# EAGLE board Display50_Cape (EAGLE 7.7.0)
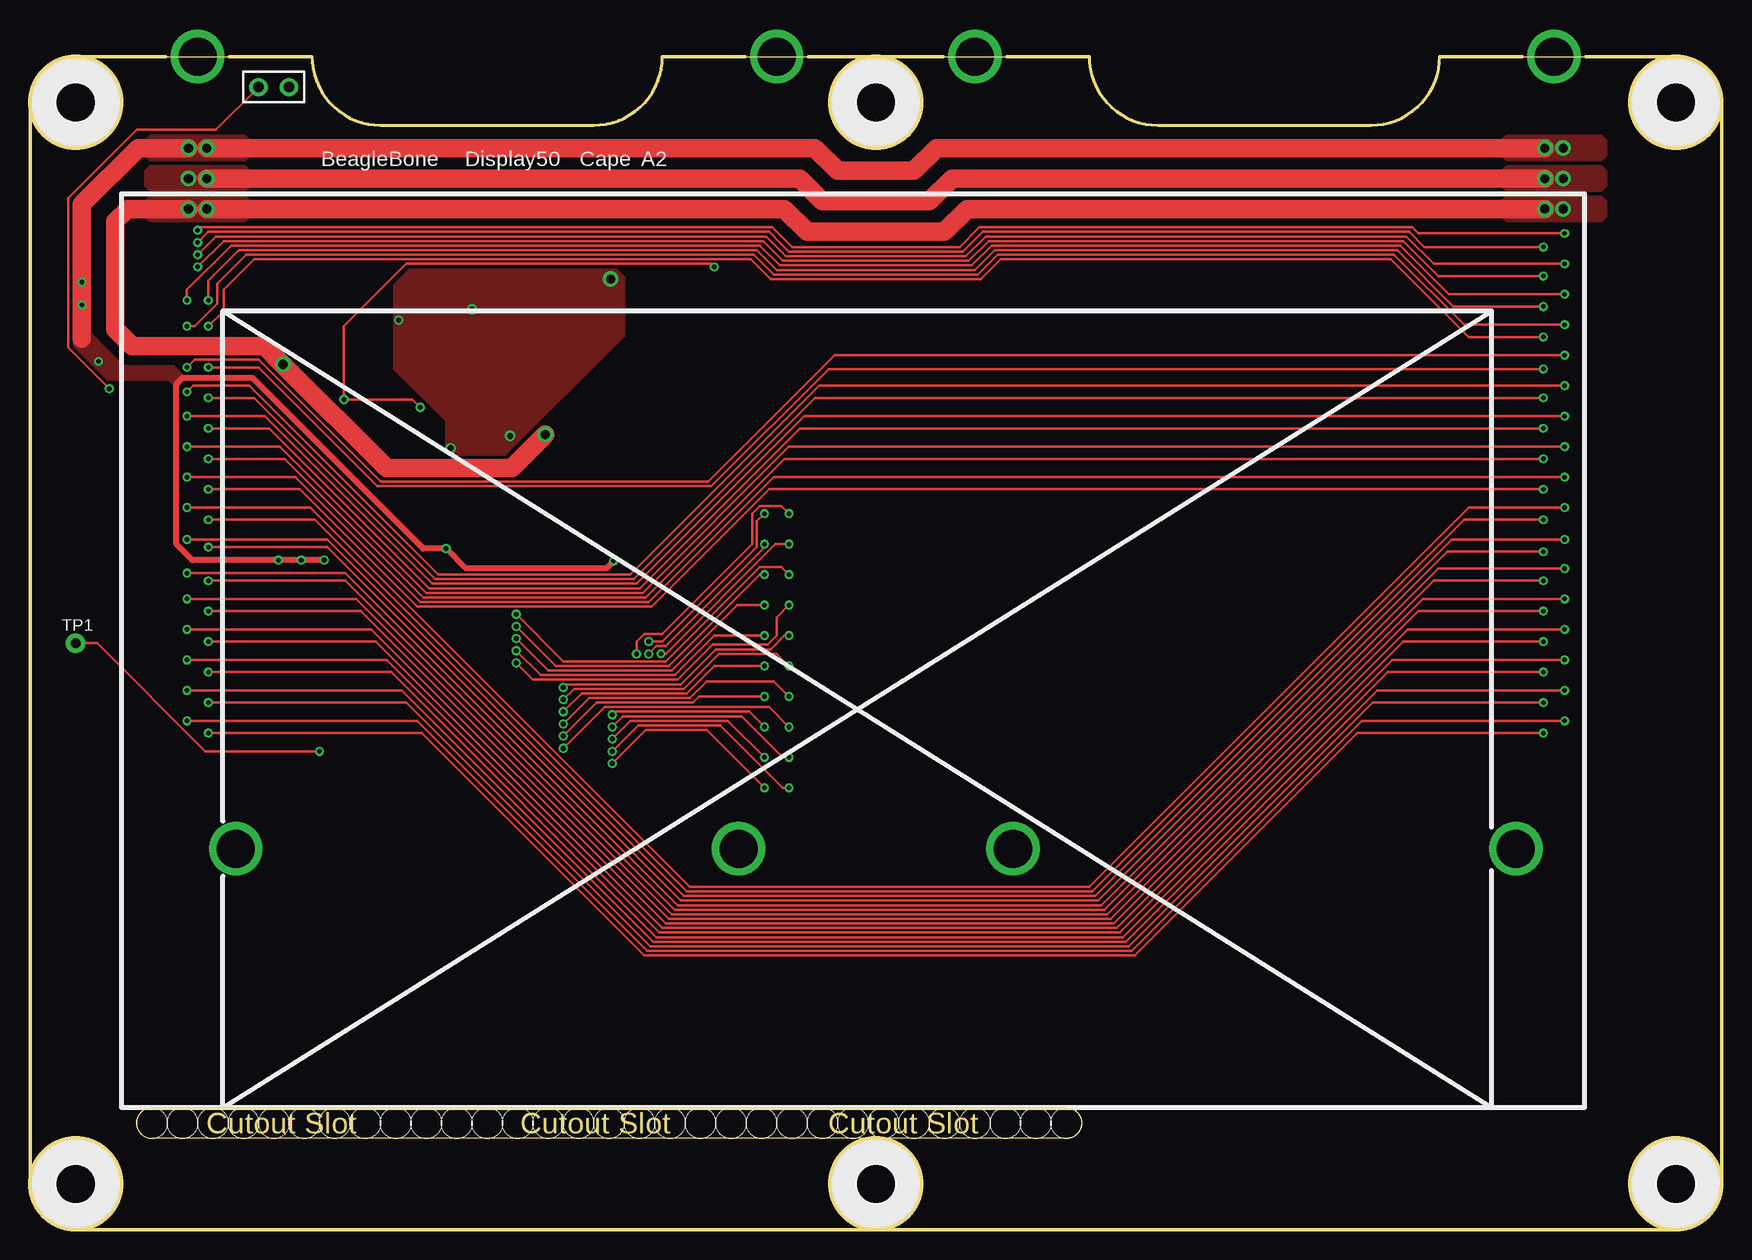
[diagram p0: board, top side]
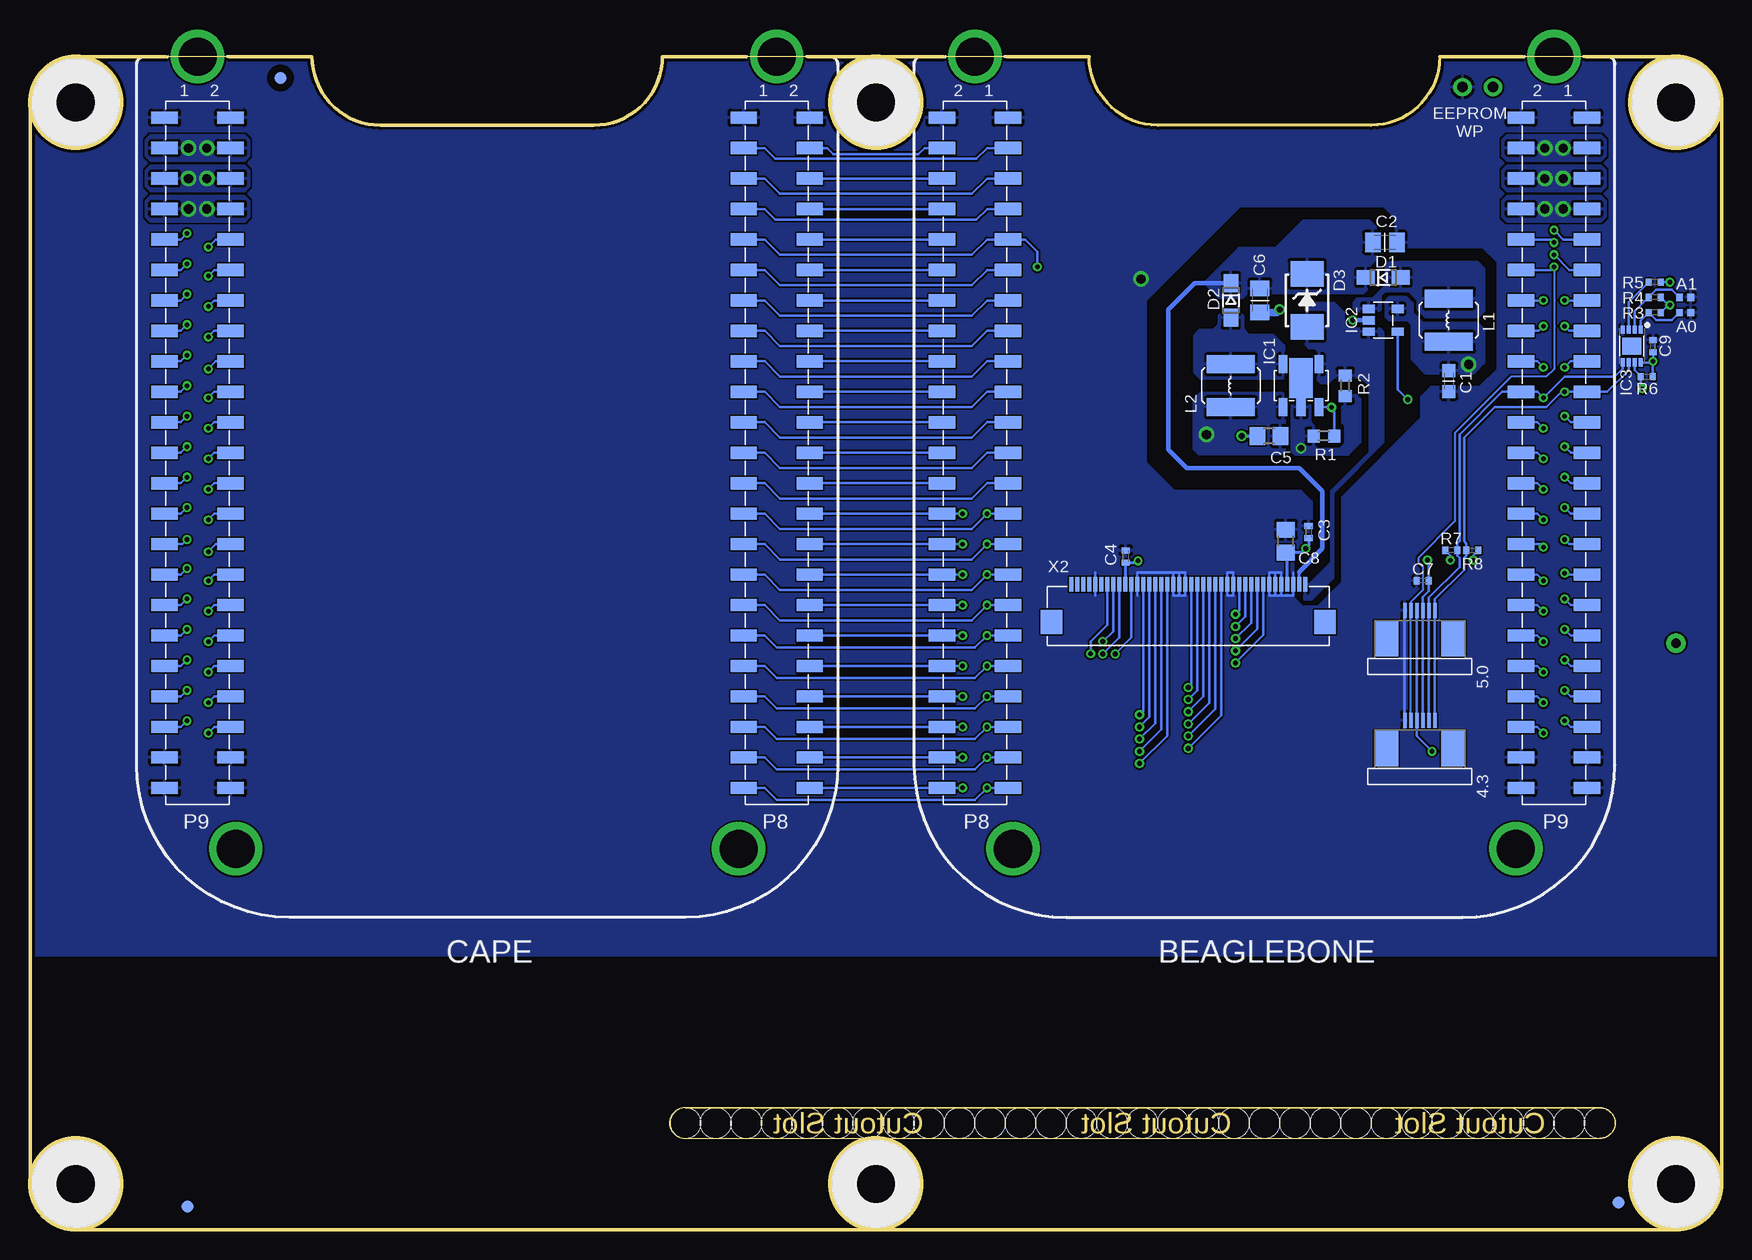
[diagram p1: board, bottom side, seen from below]

Size 140.97 x 97.79 mm. Coordinates in mm from the lower left corner, seen from the top.
Outline: 11.33,97.79 3.81,97.79 arc90 0,93.98 0,3.81 arc90 3.81,0 137.16,0 arc90 140.97,3.81 140.97,93.98 arc90 137.16,97.79 129.64,97.79
Outline: 16.61,97.79 23.5,97.79 arc90 29.21,92.08 46.99,92.08 arc90 52.7,97.79 59.59,97.79
Outline: 64.87,97.79 76.1,97.79
Outline: 81.38,97.79 88.27,97.79 arc90 93.98,92.08 111.76,92.08 arc90 117.47,97.79 124.36,97.79
Outline: 86.36,7.62 10.16,7.62 arc-180 10.16,10.16 86.36,10.16 arc-180 86.36,7.62
Outline: circle at 137.16,3.81 radius 3.81
Outline: circle at 3.81,3.81 radius 3.81
Outline: circle at 3.81,93.98 radius 3.81
Outline: circle at 137.16,93.98 radius 3.81
Outline: circle at 70.48,93.98 radius 3.81
Outline: circle at 70.48,3.81 radius 3.81
Copper layers (1+16): Top 0.035mm / dielectric 1.5mm / Bottom 0.035mm
Design rules "default *": minimum track width 6mil, minimum drill 12mil, track to track 6mil, track to pad 6mil, pad to pad 6mil, via to via 6mil, smd to smd 6mil, copper to edge 10mil, drill to drill 8mil, minimum pad ring 10mil, minimum via ring 7mil, stop-mask expansion 4mil, vias tented up to drill 35mil, thermal gap 10mil
Holes 3.2 mm at 70.48,3.81 70.48,93.98 137.16,3.81 137.16,93.98 3.81,3.81 3.81,93.98
Holes 2.54 mm at 38.1,8.89 43.18,8.89 48.26,8.89 53.34,8.89 58.42,8.89 63.5,8.89 68.58,8.89 73.66,8.89 78.74,8.89 83.82,8.89 33.02,8.89 30.48,8.89 25.4,8.89 22.86,8.89 17.78,8.89 12.7,8.89 10.16,8.89 15.24,8.89 20.32,8.89 27.94,8.89 35.56,8.89 40.64,8.89 45.72,8.89 50.8,8.89 55.88,8.89 60.96,8.89 66.04,8.89 71.12,8.89 76.2,8.89 81.28,8.89 86.36,8.89
bRestrict: 5 lines
Milling: 20 lines

## Footprints (pad centres in the part's own frame; a part is rotated, then mirrored left to right if it is on the bottom)
6-PIN-(0.5MM-PITCH)-FPC-CONNECTOR = smd 0.3 x 1.25: 1 -1.25,-2.325; 2 -0.75,-2.325; 3 -0.25,-2.325; 4 0.25,-2.325; 5 0.75,-2.325; 6 1.25,-2.325 | smd 2 x 3: M1 -2.79,0; M2 2.79,0
BEAGLEBONE.CAPE.DISPLAY-X.BEAGLEBONE = smd 1.02 x 2.2 bottom: B8.1 5.08,21.38; B8.2 5.08,26.88; B8.3 7.62,21.38; B8.4 7.62,26.88; B8.5 10.16,21.38; B8.6 10.16,26.88; B8.7 12.7,21.38; B8.8 12.7,26.88; B8.9 15.24,21.38; B8.10 15.24,26.88; B8.11 17.78,21.38; B8.12 17.78,26.88; B8.13 20.32,21.38; B8.14 20.32,26.88; B8.15 22.86,21.38; B8.16 22.86,26.88; B8.17 25.4,21.38; B8.18 25.4,26.88; B8.19 27.94,21.38; B8.20 27.94,26.88; B8.21 30.48,21.38; B8.22 30.48,26.88; B8.23 33.02,21.38; B8.24 33.02,26.88; B8.25 35.56,21.38; B8.26 35.56,26.88; B8.27 38.1,21.38; B8.28 38.1,26.88; B8.29 40.64,21.38; B8.30 40.64,26.88; B8.31 43.18,21.38; B8.32 43.18,26.88; B8.33 45.72,21.38; B8.34 45.72,26.88; B8.35 48.26,21.38; B8.36 48.26,26.88; B8.37 50.8,21.38; B8.38 50.8,26.88; B8.39 53.34,21.38; B8.40 53.34,26.88; B8.41 55.88,21.38; B8.42 55.88,26.88; B8.43 58.42,21.38; B8.44 58.42,26.88; B8.45 60.96,21.38; B8.46 60.96,26.88; B9.1 5.08,-26.88; B9.2 5.08,-21.38; B9.3 7.62,-26.88; B9.4 7.62,-21.38; B9.5 10.16,-26.88; B9.6 10.16,-21.38; B9.7 12.7,-26.88; B9.8 12.7,-21.38; B9.9 15.24,-26.88; B9.10 15.24,-21.38; B9.11 17.78,-26.88; B9.12 17.78,-21.38; B9.13 20.32,-26.88; B9.14 20.32,-21.38; B9.15 22.86,-26.88; B9.16 22.86,-21.38; B9.17 25.4,-26.88; B9.18 25.4,-21.38; B9.19 27.94,-26.88; B9.20 27.94,-21.38; B9.21 30.48,-26.88; B9.22 30.48,-21.38; B9.23 33.02,-26.88; B9.24 33.02,-21.38; B9.25 35.56,-26.88; B9.26 35.56,-21.38; B9.27 38.1,-26.88; B9.28 38.1,-21.38; B9.29 40.64,-26.88; B9.30 40.64,-21.38; B9.31 43.18,-26.88; B9.32 43.18,-21.38; B9.33 45.72,-26.88; B9.34 45.72,-21.38; B9.35 48.26,-26.88; B9.36 48.26,-21.38; B9.37 50.8,-26.88; B9.38 50.8,-21.38; B9.39 53.34,-26.88; B9.40 53.34,-21.38; B9.41 55.88,-26.88; B9.42 55.88,-21.38; B9.43 58.42,-26.88; B9.44 58.42,-21.38; B9.45 60.96,-26.88; B9.46 60.96,-21.38 | drill 3.175 pad 4.445: MH.1 0,-24.13; MH.2 66.04,-20.955; MH.3 66.04,20.955; MH.4 0,24.13
BEAGLEBONE.CAPE.DISPLAY-X.CAPE = smd 1.02 x 2.2 bottom: B8.1 5.08,-21.38; B8.2 5.08,-26.88; B8.3 7.62,-21.38; B8.4 7.62,-26.88; B8.5 10.16,-21.38; B8.6 10.16,-26.88; B8.7 12.7,-21.38; B8.8 12.7,-26.88; B8.9 15.24,-21.38; B8.10 15.24,-26.88; B8.11 17.78,-21.38; B8.12 17.78,-26.88; B8.13 20.32,-21.38; B8.14 20.32,-26.88; B8.15 22.86,-21.38; B8.16 22.86,-26.88; B8.17 25.4,-21.38; B8.18 25.4,-26.88; B8.19 27.94,-21.38; B8.20 27.94,-26.88; B8.21 30.48,-21.38; B8.22 30.48,-26.88; B8.23 33.02,-21.38; B8.24 33.02,-26.88; B8.25 35.56,-21.38; B8.26 35.56,-26.88; B8.27 38.1,-21.38; B8.28 38.1,-26.88; B8.29 40.64,-21.38; B8.30 40.64,-26.88; B8.31 43.18,-21.38; B8.32 43.18,-26.88; B8.33 45.72,-21.38; B8.34 45.72,-26.88; B8.35 48.26,-21.38; B8.36 48.26,-26.88; B8.37 50.8,-21.38; B8.38 50.8,-26.88; B8.39 53.34,-21.38; B8.40 53.34,-26.88; B8.41 55.88,-21.38; B8.42 55.88,-26.88; B8.43 58.42,-21.38; B8.44 58.42,-26.88; B8.45 60.96,-21.38; B8.46 60.96,-26.88; B9.1 5.08,26.88; B9.2 5.08,21.38; B9.3 7.62,26.88; B9.4 7.62,21.38; B9.5 10.16,26.88; B9.6 10.16,21.38; B9.7 12.7,26.88; B9.8 12.7,21.38; B9.9 15.24,26.88; B9.10 15.24,21.38; B9.11 17.78,26.88; B9.12 17.78,21.38; B9.13 20.32,26.88; B9.14 20.32,21.38; B9.15 22.86,26.88; B9.16 22.86,21.38; B9.17 25.4,26.88; B9.18 25.4,21.38; B9.19 27.94,26.88; B9.20 27.94,21.38; B9.21 30.48,26.88; B9.22 30.48,21.38; B9.23 33.02,26.88; B9.24 33.02,21.38; B9.25 35.56,26.88; B9.26 35.56,21.38; B9.27 38.1,26.88; B9.28 38.1,21.38; B9.29 40.64,26.88; B9.30 40.64,21.38; B9.31 43.18,26.88; B9.32 43.18,21.38; B9.33 45.72,26.88; B9.34 45.72,21.38; B9.35 48.26,26.88; B9.36 48.26,21.38; B9.37 50.8,26.88; B9.38 50.8,21.38; B9.39 53.34,26.88; B9.40 53.34,21.38; B9.41 55.88,26.88; B9.42 55.88,21.38; B9.43 58.42,26.88; B9.44 58.42,21.38; B9.45 60.96,26.88; B9.46 60.96,21.38 | drill 3.175 pad 4.445: MH.1 0,-24.13; MH.2 66.04,-20.955; MH.3 66.04,20.955; MH.4 0,24.13
C0603K = smd 1.05 x 1.08: 1 -0.875,0; 2 0.875,0
C0805K = smd 1.3 x 1.6: 1 -1,0; 2 1,0
C0402K = smd 0.5 x 0.7: 1 -0.5,0; 2 0.5,0
0805 = smd 1.3 x 1.5: 1 -0.95,0; 2 0.95,0
0402 = smd 0.5 x 0.6: 1 -0.5,0; 2 0.5,0
SOD323(NXP)WAVE = smd 1.5 x 1.2: A 1.45,0; C -1.45,0
SMB(ON.SEMI) = smd 2.159 x 2.743: A 2.21,0; K -2.21,0
FIDUCIAL_40MIL = smd 1.016 x 1.016: P$1 0,0
SOT89-5(DIODES) = smd 0.68 x 1.5: 1 -1.5,-1.8; 3 1.5,-1.8; 4 1.5,1.8; 5 -1.5,1.8 | smd 0.76 x 1.5: 2 0,-1.8 | smd 1.93 x 3.35: THERMAL 0,0.625
SOT23-5(FAIRCHILD) = smd 0.7 x 1: 1 -0.95,-1.2; 2 0,-1.2; 3 0.95,-1.2; 4 0.95,1.2; 5 -0.95,1.2
UDFN8,2X3(ON-SEMI) = smd 0.3 x 0.68: 1 0.75,1.36; 2 0.25,1.36; 3 -0.25,1.36; 4 -0.75,1.36; 5 -0.75,-1.36; 6 -0.25,-1.36; 7 0.25,-1.36; 8 0.75,-1.36 | smd 1.56 x 1.45: P$1 0,0
JUMPER-(X2) = drill 0.889 pad 1.524: 1 -1.27,0; 2 1.27,0
NRS(TAIYO.YUDEN) = smd 1.5 x 4: 1 -1.8,0; 2 1.8,0
R0603 = smd 1 x 1.1: 1 -0.85,0; 2 0.85,0
SOLDER.JOINT(0402) = smd 0.55 x 0.6: 1 -0.475,0; 2 0.475,0
TESTPAD/W_HOLE_1X1 = drill 0.813 pad 1.626: P$1 0,0
KISD04-40_T1_E = smd 0.295 x 1.2: 1 9.75,3; 2 9.25,3; 3 8.75,3; 4 8.25,3; 5 7.75,3; 6 7.25,3; 7 6.75,3; 8 6.25,3; 9 5.75,3; 10 5.25,3; 11 4.75,3; 12 4.25,3; 13 3.75,3; 14 3.25,3; 15 2.75,3; 16 2.25,3; 17 1.75,3; 18 1.25,3; 19 0.75,3; 20 0.25,3; 21 -0.25,3; 22 -0.75,3; 23 -1.25,3; 24 -1.75,3; 25 -2.25,3; 26 -2.75,3; 27 -3.25,3; 28 -3.75,3; 29 -4.25,3; 30 -4.75,3; 31 -5.25,3; 32 -5.75,3; 33 -6.25,3; 34 -6.75,3; 35 -7.25,3; 36 -7.75,3; 37 -8.25,3; 38 -8.75,3; 39 -9.25,3; 40 -9.75,3 | smd 1.8 x 2: G1 -11.4,-0.15; G2 11.4,-0.15

## Placement (x,y rotation side)
4.3  [6-PIN-(0.5MM-PITCH)-FPC-CONNECTOR]  25.15,40.13 180 bottom
5.0  [6-PIN-(0.5MM-PITCH)-FPC-CONNECTOR]  25.15,49.28 180 bottom
BB.DISPLAY.CAPE-(BEAGLEBONE)  BEAGLEBONE.CAPE.DISPLAY-X.BEAGLEBONE  [BEAGLEBONE.CAPE.DISPLAY-X.BEAGLEBONE]  38.1,97.79 270 top
BB.DISPLAY.CAPE-(CAPE)  BEAGLEBONE.CAPE.DISPLAY-X.CAPE  [BEAGLEBONE.CAPE.DISPLAY-X.CAPE]  102.87,97.79 270 top
C1  DNP (10uF)  [C0603K]  22.73,70.74 270 bottom
C2  DNP (1uF 50V)  [C0805K]  28.07,82.3 0 bottom
C3  .1uF  [C0402K]  34.42,58.17 90 bottom
C4  .1uF  [C0402K]  49.66,56.13 90 bottom
C5  22uF  [0805]  37.72,66.17 180 bottom
C6  2.2uF 50V  [C0805K]  38.48,77.47 270 bottom
C7  .1uF  [0402]  24.89,54.1 180 bottom
C8  22uF  [0805]  36.32,57.4 90 bottom
C9  .1uF  [0402]  5.71,73.66 90 bottom
D1  DNP (ZHCS400 40V 400mA)  [SOD323(NXP)WAVE]  28.19,79.38 0 bottom
D2  ZHCS400 40V 400mA  [SOD323(NXP)WAVE]  40.89,77.47 270 bottom
D3  DNP (33V 3W)  [SMB(ON.SEMI)]  34.54,77.47 270 bottom
FUD1  FIDUCIAL  [FIDUCIAL_40MIL]  120.09,96.02 0 bottom
FUD2  FIDUCIAL  [FIDUCIAL_40MIL]  8.61,2.25 0 bottom
FUD3  FIDUCIAL  [FIDUCIAL_40MIL]  127.84,1.92 270 bottom
IC1  PT4110  [SOT89-5(DIODES)]  35.05,70.36 0 bottom
IC2  DNP (FAN5333BSX)  [SOT23-5(FAIRCHILD)]  28.19,75.82 270 bottom
IC3  [UDFN8,2X3(ON-SEMI)]  7.49,73.66 0 bottom
JMP1  JUMPER-(X2)  [JUMPER-(X2)]  20.32,95.25 0 top
L1  DNP (10uH)  [NRS(TAIYO.YUDEN)]  22.73,75.82 90 bottom
L2  10uH  [NRS(TAIYO.YUDEN)]  40.89,70.36 90 bottom
R1  10k  [R0603]  33.15,66.17 180 bottom
R2  20  [R0603]  31.37,70.36 270 bottom
R3  1k  [0402]  5.59,76.45 180 bottom
R4  1k  [0402]  5.59,77.72 180 bottom
R5  1k  [0402]  5.59,78.99 180 bottom
R6  1k  [0402]  6.22,71.12 0 bottom
R7  DNP(2.2k)  [0402]  22.54,56.64 180 bottom
R8  DNP(2.2k)  [0402]  20.76,56.64 0 bottom
SJ1  [SOLDER.JOINT(0402)]  3.05,76.45 180 bottom
SJ2  [SOLDER.JOINT(0402)]  3.05,77.72 180 bottom
TP1  TESTPAD/W_HOLE_1X1  [TESTPAD/W_HOLE_1X1]  3.81,48.9 0 top
X2  [KISD04-40_T1_E]  44.45,50.8 0 bottom

## Library data of the parts
4.3 5.0 = GHI-Connectors
BB.DISPLAY.CAPE-(BEAGLEBONE) BB.DISPLAY.CAPE-(CAPE) = GHI-Solutions
C1-C4 C6 R1 R2 = rcl
C5 C7-C9 D1-D3 L1 L2 R3-R8 = GHI-BasicComponents
FUD1-FUD3 = GHI
IC1-IC3 = GHI-IC
JMP1 = GHI-Headers
SJ1 SJ2 = GHI-Miscellaneous
TP1 = GHI2
X2 = GHI-VisualComponents

## Nets
+5V: BB.DISPLAY.CAPE-(BEAGLEBONE).B9.7 BB.DISPLAY.CAPE-(BEAGLEBONE).B9.8 BB.DISPLAY.CAPE-(CAPE).B9.7 BB.DISPLAY.CAPE-(CAPE).B9.8 C1.1 C5.1 IC1.1 IC2.5 L1.1 L2.1
A0: IC3.1 R3.2 SJ1.2
A1: IC3.2 R4.2 SJ2.2
A2: IC3.3 R5.2
BL+: D1.A IC2.1 L1.2
CAP.TOUCH.IRQ: 4.3.5 5.0.5 BB.DISPLAY.CAPE-(BEAGLEBONE).B9.12 BB.DISPLAY.CAPE-(CAPE).B9.12
GND [power]: 4.3.6 5.0.6 BB.DISPLAY.CAPE-(BEAGLEBONE).B8.1 BB.DISPLAY.CAPE-(BEAGLEBONE).B8.2 BB.DISPLAY.CAPE-(BEAGLEBONE).B9.1 BB.DISPLAY.CAPE-(BEAGLEBONE).B9.2 BB.DISPLAY.CAPE-(BEAGLEBONE).B9.43 BB.DISPLAY.CAPE-(BEAGLEBONE).B9.44 BB.DISPLAY.CAPE-(BEAGLEBONE).B9.45 BB.DISPLAY.CAPE-(BEAGLEBONE).B9.46 BB.DISPLAY.CAPE-(CAPE).B8.1 BB.DISPLAY.CAPE-(CAPE).B8.2 BB.DISPLAY.CAPE-(CAPE).B9.1 BB.DISPLAY.CAPE-(CAPE).B9.2 BB.DISPLAY.CAPE-(CAPE).B9.43 BB.DISPLAY.CAPE-(CAPE).B9.44 BB.DISPLAY.CAPE-(CAPE).B9.45 BB.DISPLAY.CAPE-(CAPE).B9.46 C1.2 C2.2 C3.2 C4.2 C5.2 C6.2 C7.2 C8.2 C9.2 IC1.2 IC1.THERMAL IC2.2 IC3.4 JMP1.2 R1.2 R2.2 SJ1.1 SJ2.1 X2.3 X2.5 X2.6 X2.7 X2.13 X2.14 X2.21 X2.22 X2.23 X2.29 X2.36
I2C.SCL: 4.3.1 5.0.1 BB.DISPLAY.CAPE-(BEAGLEBONE).B9.19 BB.DISPLAY.CAPE-(CAPE).B9.19 IC3.6 R8.1
I2C.SDA: 4.3.2 5.0.2 BB.DISPLAY.CAPE-(BEAGLEBONE).B9.20 BB.DISPLAY.CAPE-(CAPE).B9.20 IC3.5 R7.1
LCD.B3: BB.DISPLAY.CAPE-(BEAGLEBONE).B8.45 BB.DISPLAY.CAPE-(CAPE).B8.45 X2.24
LCD.B4: BB.DISPLAY.CAPE-(BEAGLEBONE).B8.46 BB.DISPLAY.CAPE-(CAPE).B8.46 X2.25
LCD.B5: BB.DISPLAY.CAPE-(BEAGLEBONE).B8.43 BB.DISPLAY.CAPE-(CAPE).B8.43 X2.26
LCD.B6: BB.DISPLAY.CAPE-(BEAGLEBONE).B8.44 BB.DISPLAY.CAPE-(CAPE).B8.44 X2.27
LCD.B7: BB.DISPLAY.CAPE-(BEAGLEBONE).B8.41 BB.DISPLAY.CAPE-(CAPE).B8.41 X2.28
LCD.BACKLIGHT: BB.DISPLAY.CAPE-(BEAGLEBONE).B8.9 BB.DISPLAY.CAPE-(CAPE).B8.9 IC1.3 IC2.4 R1.1
LCD.CLK: BB.DISPLAY.CAPE-(BEAGLEBONE).B8.28 BB.DISPLAY.CAPE-(CAPE).B8.28 X2.30
LCD.DEN: BB.DISPLAY.CAPE-(BEAGLEBONE).B8.30 BB.DISPLAY.CAPE-(CAPE).B8.30 X2.34
LCD.G2: BB.DISPLAY.CAPE-(BEAGLEBONE).B8.42 BB.DISPLAY.CAPE-(CAPE).B8.42 X2.15
LCD.G3: BB.DISPLAY.CAPE-(BEAGLEBONE).B8.39 BB.DISPLAY.CAPE-(CAPE).B8.39 X2.16
LCD.G4: BB.DISPLAY.CAPE-(BEAGLEBONE).B8.40 BB.DISPLAY.CAPE-(CAPE).B8.40 X2.17
LCD.G5: BB.DISPLAY.CAPE-(BEAGLEBONE).B8.37 BB.DISPLAY.CAPE-(CAPE).B8.37 X2.18
LCD.G6: BB.DISPLAY.CAPE-(BEAGLEBONE).B8.38 BB.DISPLAY.CAPE-(CAPE).B8.38 X2.19
LCD.G7: BB.DISPLAY.CAPE-(BEAGLEBONE).B8.36 BB.DISPLAY.CAPE-(CAPE).B8.36 X2.20
LCD.HSYNC: BB.DISPLAY.CAPE-(BEAGLEBONE).B8.29 BB.DISPLAY.CAPE-(CAPE).B8.29 X2.32
LCD.R3: BB.DISPLAY.CAPE-(BEAGLEBONE).B8.34 BB.DISPLAY.CAPE-(CAPE).B8.34 X2.8
LCD.R4: BB.DISPLAY.CAPE-(BEAGLEBONE).B8.35 BB.DISPLAY.CAPE-(CAPE).B8.35 X2.9
LCD.R5: BB.DISPLAY.CAPE-(BEAGLEBONE).B8.33 BB.DISPLAY.CAPE-(CAPE).B8.33 X2.10
LCD.R6: BB.DISPLAY.CAPE-(BEAGLEBONE).B8.31 BB.DISPLAY.CAPE-(CAPE).B8.31 X2.11
LCD.R7: BB.DISPLAY.CAPE-(BEAGLEBONE).B8.32 BB.DISPLAY.CAPE-(CAPE).B8.32 X2.12
LCD.VSYNC: BB.DISPLAY.CAPE-(BEAGLEBONE).B8.27 BB.DISPLAY.CAPE-(CAPE).B8.27 X2.33
LED+: C2.1 C6.1 D1.C D2.C D3.K X2.2
LED-: D3.A IC1.4 IC2.3 R2.1 X2.1
P8.3: BB.DISPLAY.CAPE-(BEAGLEBONE).B8.3 BB.DISPLAY.CAPE-(CAPE).B8.3
P8.4: BB.DISPLAY.CAPE-(BEAGLEBONE).B8.4 BB.DISPLAY.CAPE-(CAPE).B8.4
P8.5: BB.DISPLAY.CAPE-(BEAGLEBONE).B8.5 BB.DISPLAY.CAPE-(CAPE).B8.5
P8.6: BB.DISPLAY.CAPE-(BEAGLEBONE).B8.6 BB.DISPLAY.CAPE-(CAPE).B8.6
P8.7: BB.DISPLAY.CAPE-(BEAGLEBONE).B8.7 BB.DISPLAY.CAPE-(CAPE).B8.7
P8.8: BB.DISPLAY.CAPE-(BEAGLEBONE).B8.8 BB.DISPLAY.CAPE-(CAPE).B8.8
P8.10: BB.DISPLAY.CAPE-(BEAGLEBONE).B8.10 BB.DISPLAY.CAPE-(CAPE).B8.10
P8.11: BB.DISPLAY.CAPE-(BEAGLEBONE).B8.11 BB.DISPLAY.CAPE-(CAPE).B8.11
P8.12: BB.DISPLAY.CAPE-(BEAGLEBONE).B8.12 BB.DISPLAY.CAPE-(CAPE).B8.12
P8.13: BB.DISPLAY.CAPE-(BEAGLEBONE).B8.13 BB.DISPLAY.CAPE-(CAPE).B8.13
P8.14: BB.DISPLAY.CAPE-(BEAGLEBONE).B8.14 BB.DISPLAY.CAPE-(CAPE).B8.14
P8.15: BB.DISPLAY.CAPE-(BEAGLEBONE).B8.15 BB.DISPLAY.CAPE-(CAPE).B8.15
P8.16: BB.DISPLAY.CAPE-(BEAGLEBONE).B8.16 BB.DISPLAY.CAPE-(CAPE).B8.16
P8.17: BB.DISPLAY.CAPE-(BEAGLEBONE).B8.17 BB.DISPLAY.CAPE-(CAPE).B8.17
P8.18: BB.DISPLAY.CAPE-(BEAGLEBONE).B8.18 BB.DISPLAY.CAPE-(CAPE).B8.18
P8.19: BB.DISPLAY.CAPE-(BEAGLEBONE).B8.19 BB.DISPLAY.CAPE-(CAPE).B8.19
P8.20: BB.DISPLAY.CAPE-(BEAGLEBONE).B8.20 BB.DISPLAY.CAPE-(CAPE).B8.20
P8.21: BB.DISPLAY.CAPE-(BEAGLEBONE).B8.21 BB.DISPLAY.CAPE-(CAPE).B8.21
P8.22: BB.DISPLAY.CAPE-(BEAGLEBONE).B8.22 BB.DISPLAY.CAPE-(CAPE).B8.22
P8.23: BB.DISPLAY.CAPE-(BEAGLEBONE).B8.23 BB.DISPLAY.CAPE-(CAPE).B8.23
P8.24: BB.DISPLAY.CAPE-(BEAGLEBONE).B8.24 BB.DISPLAY.CAPE-(CAPE).B8.24
P8.25: BB.DISPLAY.CAPE-(BEAGLEBONE).B8.25 BB.DISPLAY.CAPE-(CAPE).B8.25
P8.26: BB.DISPLAY.CAPE-(BEAGLEBONE).B8.26 BB.DISPLAY.CAPE-(CAPE).B8.26
P9.9: BB.DISPLAY.CAPE-(BEAGLEBONE).B9.9 BB.DISPLAY.CAPE-(CAPE).B9.9
P9.10: BB.DISPLAY.CAPE-(BEAGLEBONE).B9.10 BB.DISPLAY.CAPE-(CAPE).B9.10
P9.11: BB.DISPLAY.CAPE-(BEAGLEBONE).B9.11 BB.DISPLAY.CAPE-(CAPE).B9.11
P9.13: BB.DISPLAY.CAPE-(BEAGLEBONE).B9.13 BB.DISPLAY.CAPE-(CAPE).B9.13
P9.14: BB.DISPLAY.CAPE-(BEAGLEBONE).B9.14 BB.DISPLAY.CAPE-(CAPE).B9.14
P9.15: BB.DISPLAY.CAPE-(BEAGLEBONE).B9.15 BB.DISPLAY.CAPE-(CAPE).B9.15
P9.16: BB.DISPLAY.CAPE-(BEAGLEBONE).B9.16 BB.DISPLAY.CAPE-(CAPE).B9.16
P9.17: BB.DISPLAY.CAPE-(BEAGLEBONE).B9.17 BB.DISPLAY.CAPE-(CAPE).B9.17
P9.18: BB.DISPLAY.CAPE-(BEAGLEBONE).B9.18 BB.DISPLAY.CAPE-(CAPE).B9.18
P9.21: BB.DISPLAY.CAPE-(BEAGLEBONE).B9.21 BB.DISPLAY.CAPE-(CAPE).B9.21
P9.22: BB.DISPLAY.CAPE-(BEAGLEBONE).B9.22 BB.DISPLAY.CAPE-(CAPE).B9.22
P9.23: BB.DISPLAY.CAPE-(BEAGLEBONE).B9.23 BB.DISPLAY.CAPE-(CAPE).B9.23
P9.24: BB.DISPLAY.CAPE-(BEAGLEBONE).B9.24 BB.DISPLAY.CAPE-(CAPE).B9.24
P9.25: BB.DISPLAY.CAPE-(BEAGLEBONE).B9.25 BB.DISPLAY.CAPE-(CAPE).B9.25
P9.26: BB.DISPLAY.CAPE-(BEAGLEBONE).B9.26 BB.DISPLAY.CAPE-(CAPE).B9.26
P9.27: BB.DISPLAY.CAPE-(BEAGLEBONE).B9.27 BB.DISPLAY.CAPE-(CAPE).B9.27
P9.28: BB.DISPLAY.CAPE-(BEAGLEBONE).B9.28 BB.DISPLAY.CAPE-(CAPE).B9.28
P9.29: BB.DISPLAY.CAPE-(BEAGLEBONE).B9.29 BB.DISPLAY.CAPE-(CAPE).B9.29
P9.30: BB.DISPLAY.CAPE-(BEAGLEBONE).B9.30 BB.DISPLAY.CAPE-(CAPE).B9.30
P9.31: BB.DISPLAY.CAPE-(BEAGLEBONE).B9.31 BB.DISPLAY.CAPE-(CAPE).B9.31
P9.32: BB.DISPLAY.CAPE-(BEAGLEBONE).B9.32 BB.DISPLAY.CAPE-(CAPE).B9.32
P9.33: BB.DISPLAY.CAPE-(BEAGLEBONE).B9.33 BB.DISPLAY.CAPE-(CAPE).B9.33
P9.34: BB.DISPLAY.CAPE-(BEAGLEBONE).B9.34 BB.DISPLAY.CAPE-(CAPE).B9.34
P9.35: BB.DISPLAY.CAPE-(BEAGLEBONE).B9.35 BB.DISPLAY.CAPE-(CAPE).B9.35
P9.36: BB.DISPLAY.CAPE-(BEAGLEBONE).B9.36 BB.DISPLAY.CAPE-(CAPE).B9.36
P9.37: BB.DISPLAY.CAPE-(BEAGLEBONE).B9.37 BB.DISPLAY.CAPE-(CAPE).B9.37
P9.38: BB.DISPLAY.CAPE-(BEAGLEBONE).B9.38 BB.DISPLAY.CAPE-(CAPE).B9.38
P9.39: BB.DISPLAY.CAPE-(BEAGLEBONE).B9.39 BB.DISPLAY.CAPE-(CAPE).B9.39
P9.40: BB.DISPLAY.CAPE-(BEAGLEBONE).B9.40 BB.DISPLAY.CAPE-(CAPE).B9.40
P9.41: BB.DISPLAY.CAPE-(BEAGLEBONE).B9.41 BB.DISPLAY.CAPE-(CAPE).B9.41
P9.42: BB.DISPLAY.CAPE-(BEAGLEBONE).B9.42 BB.DISPLAY.CAPE-(CAPE).B9.42
PUMP: D2.A IC1.5 L2.2
VCC: 4.3.3 5.0.3 BB.DISPLAY.CAPE-(BEAGLEBONE).B9.3 BB.DISPLAY.CAPE-(BEAGLEBONE).B9.4 BB.DISPLAY.CAPE-(CAPE).B9.3 BB.DISPLAY.CAPE-(CAPE).B9.4 C3.1 C4.1 C7.1 C8.1 C9.1 IC3.8 R3.1 R4.1 R5.1 R6.2 R7.2 R8.2 X2.4 X2.31
VDD.5V: BB.DISPLAY.CAPE-(BEAGLEBONE).B9.5 BB.DISPLAY.CAPE-(BEAGLEBONE).B9.6 BB.DISPLAY.CAPE-(CAPE).B9.5 BB.DISPLAY.CAPE-(CAPE).B9.6
WAKE: 4.3.4 5.0.4 TP1.P$1
WP: IC3.7 JMP1.1 R6.1

## Tracks (layer width: path | path; a pad name or v marks a point on that pad's centre or on a via)
+5V  (via drill 0.76 pad 0.18)
  Top 1.524: v14.73,85.09 62.87,85.09 64.77,83.19 76.2,83.19 78.11,85.09 v126.24,85.09 | v13.21,85.09 8.13,85.09 7.11,84.07 7.11,75.06 8.51,73.66 19.56,73.66 v21.08,72.14 29.72,63.5 40.13,63.5 v42.93,66.29
  other vias: 127.76,85.09
  pour Bottom: 20.7,71.37 24.64,71.37 25.78,72.52 25.78,75.44 26.16,75.82 27.69,75.82 27.94,76.07 27.94,77.47 27.69,77.72 26.29,77.72 25.78,77.22 25.78,76.45 24.89,75.56 20.32,75.56 19.81,75.06 19.81,72.26
  pour Bottom: 36.45,69.6 36.45,64.9 36.7,64.64 43.56,64.64 43.94,65.02 43.94,69.22 43.43,69.72 36.58,69.72
  pour Bottom: 9.65,84.45 9.65,85.72 10.03,86.11 17.91,86.11 18.29,85.72 18.29,84.45 17.91,84.07 10.03,84.07
  pour Bottom: 122.68,84.45 122.68,85.72 123.06,86.11 130.94,86.11 131.32,85.72 131.32,84.45 130.94,84.07 123.06,84.07
  pour Top: 9.65,84.45 9.65,85.72 10.03,86.11 17.91,86.11 18.29,85.72 18.29,84.45 17.91,84.07 10.03,84.07
  pour Top: 122.68,84.45 122.68,85.72 123.06,86.11 130.94,86.11 131.32,85.72 131.32,84.45 130.94,84.07 123.06,84.07
A0
  Bottom 0.203: SJ1.2 4.16,75.82 5.45,75.82 R3.2 6.74,75.8 IC3.1
A1
  Bottom 0.203: SJ2.2 4.16,78.36 5.45,78.36 R4.2 7.24,76.57 IC3.2
A2
  Bottom 0.203: IC3.3 7.74,77.34 R5.2
BL+
  pour Bottom: 20.32,76.07 24.64,76.07 25.27,76.71 25.27,77.47 26.04,78.23 28.07,78.23 28.45,77.85 28.45,76.71 28.57,76.58 30.35,76.58 30.61,76.83 30.61,77.34 30.35,77.6 29.08,77.6 27.94,78.74 27.94,80.39 27.69,80.64 20.32,80.64 19.81,80.14 19.81,76.58
CAP.TOUCH.IRQ  (via drill 0.38 pad 0.18)
  Top 0.203: v126.11,79.5 117.35,79.5 114.43,82.42 79.88,82.42 78.23,80.77 62.74,80.77 61.09,82.42 16.13,82.42 v13.97,80.26
  Bottom 0.152: 4.3.5 5.0.5 25.9,52.34 24.89,53.34 24.89,55.24 25.27,55.63 25.27,56.01 22.23,59.05 22.23,66.42 17.53,71.12 14.61,71.12 13.97,71.75 v13.97,80.26
  Bottom 0.203: v126.11,79.5 125.6,80.01 BB.DISPLAY.CAPE-(CAPE).B9.12 | BB.DISPLAY.CAPE-(BEAGLEBONE).B9.12 14.22,80.01 v13.97,80.26
GND  (via drill 0.41, 0.51, 0.51 pad 0.18, 0.76 pad 0.18)
  Bottom 0.203: 45.2,52.86 44.7,52.86 X2.21 44.7,54.79 45.2,54.79 | 45.2,52.86 X2.22 45.2,54.79 | 45.2,52.86 45.7,52.86 X2.23 45.7,54.79 | 45.2,54.79 45.7,54.79 | 45.7,54.79 48.7,54.79 X2.29 48.7,52.86 | 37.2,54.79 X2.6 37.2,52.86 | 37.2,54.79 37.7,54.79 X2.7 37.7,52.86 37.2,52.86 | 36.7,52.86 X2.5 36.7,54.79 37.2,54.79 | 36.7,52.86 37.2,52.86 | 52.2,52.86 X2.36 52.2,54.79 | 36.7,52.86 35.7,52.86 X2.3 35.7,54.79 | X2.13 40.7,54.79 41.2,54.79 X2.14 41.2,52.86 40.7,52.86 X2.13
  Bottom 0.254: 4.3.6 5.0.6
  Bottom 0.305: C5.2 v40.01,66.17
  Bottom 0.381: IC2.2 v30.73,75.82 | IC1.THERMAL IC1.2
  Bottom 0.61: C6.2 37.07,76.47 v36.83,76.71
  other vias: 35.05,65.15 48.39,79.25
  pour Bottom: 35.05,69.09 35.43,68.71 35.81,68.71 35.81,64.9 35.56,64.64 31.11,64.64 30.1,65.66 30.1,69.22 30.48,69.6 31.62,69.6 31.62,67.31 31.37,67.06 31.37,65.53 31.88,65.02 33.66,65.02 33.91,65.28 33.91,66.93 34.29,67.31 34.29,68.71 34.67,68.71
  pour Bottom (rank 2): -0.64,22.86 34.7,22.86 34.7,51.94 33.66,51.94 31.62,53.98 31.62,61.09 25.02,67.69 25.02,69.47 24.26,70.23 20.19,70.23 18.67,71.75 18.67,80.64 19.94,81.92 27.18,81.92 27.18,84.33 28.19,85.34 40.13,85.34 48.01,77.47 48.01,64.01 45.59,61.59 35.05,61.59 34.16,60.71 34.16,57.4 35.69,55.88 35.69,52.73 34.9,51.94 34.9,22.86 141.6,22.86 141.6,98.42 -0.64,98.42
  pour Top: 35.05,64.64 39.62,64.64 49.53,74.55 49.53,79.38 48.9,80.01 31.62,80.01 30.35,78.74 30.35,71.75 34.67,67.44 34.67,65.02
I2C.SCL  (via drill 0.38 pad 0.18)
  Top 0.203: v127.89,70.36 65.79,70.36 50.04,54.61 34.04,54.61 18.29,70.36 13.59,70.36 v13.08,69.85
  Bottom 0.203: 4.3.1 5.0.1 23.9,52.56 21.46,54.99 21.46,56.01 21.27,56.21 R8.1 21.27,57.21 21.46,57.4 21.46,66.04 18.92,68.58 14.61,68.58 13.34,69.85 v13.08,69.85 BB.DISPLAY.CAPE-(BEAGLEBONE).B9.19 9.53,69.85 7.74,71.63 IC3.6 | v127.89,70.36 128.4,69.85 BB.DISPLAY.CAPE-(CAPE).B9.19
I2C.SDA  (via drill 0.38 pad 0.18)
  Top 0.203: v14.86,69.34 18.67,69.34 33.78,54.23 50.29,54.23 65.41,69.34 v126.11,69.34
  Bottom 0.203: 4.3.2 5.0.2 24.4,52.69 21.84,55.24 21.84,56.01 22.04,56.21 R7.1 22.04,57.21 21.84,57.4 21.84,66.29 18.29,69.85 BB.DISPLAY.CAPE-(BEAGLEBONE).B9.20 15.37,69.85 v14.86,69.34 13.08,71.12 8.89,71.12 8.24,71.77 IC3.5 | v126.11,69.34 125.6,69.85 BB.DISPLAY.CAPE-(CAPE).B9.20
LCD.B3  (via drill 0.38 pad 0.18, 0.41)
  Top 0.203: v48.51,38.86 51.31,41.66 56.39,41.66 v61.21,36.83
  Bottom 0.203: BB.DISPLAY.CAPE-(CAPE).B8.45 79.76,36.83 78.74,35.81 62.23,35.81 v61.21,36.83 BB.DISPLAY.CAPE-(BEAGLEBONE).B8.45 | X2.24 46.2,41.18 v48.51,38.86
LCD.B4  (via drill 0.38 pad 0.18, 0.41)
  Top 0.203: v48.51,39.88 50.67,42.04 57.53,42.04 62.74,36.83 v63.25,36.83
  Bottom 0.203: BB.DISPLAY.CAPE-(CAPE).B8.46 BB.DISPLAY.CAPE-(BEAGLEBONE).B8.46 v63.25,36.83 | X2.25 46.7,41.69 v48.51,39.88
LCD.B5  (via drill 0.38 pad 0.18, 0.41)
  Top 0.203: v48.51,40.89 50.04,42.42 58.17,42.42 v61.21,39.37
  Bottom 0.203: BB.DISPLAY.CAPE-(CAPE).B8.43 79.76,39.37 78.74,38.35 62.23,38.35 v61.21,39.37 BB.DISPLAY.CAPE-(BEAGLEBONE).B8.43 | X2.26 47.2,42.21 v48.51,40.89
LCD.B6  (via drill 0.38 pad 0.18, 0.41)
  Top 0.203: v48.51,41.91 49.4,42.8 59.31,42.8 62.74,39.37 v63.25,39.37
  Bottom 0.203: BB.DISPLAY.CAPE-(CAPE).B8.44 BB.DISPLAY.CAPE-(BEAGLEBONE).B8.44 v63.25,39.37 | X2.27 47.7,42.72 v48.51,41.91
LCD.B7  (via drill 0.38 pad 0.18, 0.41)
  Top 0.203: v48.51,42.93 48.77,43.18 59.94,43.18 v61.21,41.91
  Bottom 0.203: BB.DISPLAY.CAPE-(BEAGLEBONE).B8.41 v61.21,41.91 62.23,40.89 78.74,40.89 79.76,41.91 BB.DISPLAY.CAPE-(CAPE).B8.41 | X2.28 48.2,43.24 v48.51,42.93
LCD.BACKLIGHT  (via drill 0.38 pad 0.18, 0.41)
  Top 0.203: v32.51,68.56 31.85,69.22 v26.16,69.22 26.16,75.31 31.37,80.52 56.77,80.52 v57.02,80.26
  Bottom 0.203: IC2.4 26.99,70.05 v26.16,69.22 | IC1.3 v32.51,68.56 32.3,68.34 R1.1 | BB.DISPLAY.CAPE-(CAPE).B8.9 79.76,82.55 78.49,81.28 62.48,81.28 61.21,82.55 BB.DISPLAY.CAPE-(BEAGLEBONE).B8.9 58.04,82.55 57.02,81.53 v57.02,80.26
LCD.CLK  (via drill 0.38 pad 0.18, 0.41)
  Top 0.203: v50.55,48.01 50.55,49.02 51.18,49.66 52.7,49.66 60.2,57.15 60.2,59.69 60.83,60.33 62.61,60.33 v63.25,59.69
  Bottom 0.203: BB.DISPLAY.CAPE-(CAPE).B8.28 BB.DISPLAY.CAPE-(BEAGLEBONE).B8.28 v63.25,59.69 | X2.30 49.2,49.35 v50.55,48.01
LCD.DEN  (via drill 0.38 pad 0.18)
  Top 0.203: v52.58,48.01 52.96,48.01 62.1,57.15 v63.25,57.15
  Bottom 0.203: BB.DISPLAY.CAPE-(CAPE).B8.30 BB.DISPLAY.CAPE-(BEAGLEBONE).B8.30 v63.25,57.15 | X2.34 51.2,50.4 52.58,49.02 v52.58,48.01
LCD.G2  (via drill 0.38 pad 0.18, 0.41)
  Top 0.203: v63.25,41.91 61.59,43.56 47.88,43.56 v44.45,40.13
  Bottom 0.203: BB.DISPLAY.CAPE-(CAPE).B8.42 BB.DISPLAY.CAPE-(BEAGLEBONE).B8.42 v63.25,41.91 | X2.15 41.7,42.88 v44.45,40.13
LCD.G3  (via drill 0.38 pad 0.18, 0.41)
  Top 0.203: v61.21,44.45 55.75,44.45 55.24,43.94 47.24,43.94 v44.45,41.15
  Bottom 0.203: BB.DISPLAY.CAPE-(BEAGLEBONE).B8.39 v61.21,44.45 62.23,43.43 78.74,43.43 79.76,44.45 BB.DISPLAY.CAPE-(CAPE).B8.39 | X2.16 42.2,43.4 v44.45,41.15
LCD.G4  (via drill 0.38 pad 0.18, 0.41)
  Top 0.203: v63.25,44.45 61.98,45.72 56.39,45.72 54.99,44.32 46.61,44.32 v44.45,42.16
  Bottom 0.203: BB.DISPLAY.CAPE-(CAPE).B8.40 BB.DISPLAY.CAPE-(BEAGLEBONE).B8.40 v63.25,44.45 | X2.17 42.7,43.91 v44.45,42.16
LCD.G5  (via drill 0.38 pad 0.18, 0.41)
  Top 0.203: v61.21,46.99 57.02,46.99 54.74,44.7 45.97,44.7 v44.45,43.18
  Bottom 0.203: BB.DISPLAY.CAPE-(BEAGLEBONE).B8.37 v61.21,46.99 62.23,45.97 78.74,45.97 79.76,46.99 BB.DISPLAY.CAPE-(CAPE).B8.37 | X2.18 43.2,44.43 v44.45,43.18
LCD.G6  (via drill 0.38 pad 0.18, 0.41)
  Top 0.203: v63.25,46.99 62.23,48.01 57.4,48.01 54.48,45.09 45.34,45.09 v44.45,44.2
  Bottom 0.203: BB.DISPLAY.CAPE-(CAPE).B8.38 BB.DISPLAY.CAPE-(BEAGLEBONE).B8.38 v63.25,46.99 | X2.19 43.7,44.95 v44.45,44.2
LCD.G7  (via drill 0.38 pad 0.18, 0.41)
  Top 0.203: v63.25,49.53 62.87,49.53 61.72,48.39 57.15,48.39 54.23,45.47 44.7,45.47 v44.45,45.21
  Bottom 0.203: BB.DISPLAY.CAPE-(CAPE).B8.36 BB.DISPLAY.CAPE-(BEAGLEBONE).B8.36 v63.25,49.53 | X2.20 44.2,45.46 v44.45,45.21
LCD.HSYNC  (via drill 0.38 pad 0.18, 0.41)
  Top 0.203: v51.56,48.01 52.2,48.64 52.96,48.64 61.21,56.9 v61.21,57.15
  Bottom 0.203: BB.DISPLAY.CAPE-(BEAGLEBONE).B8.29 v61.21,57.15 62.48,55.88 78.49,55.88 79.76,57.15 BB.DISPLAY.CAPE-(CAPE).B8.29 | X2.32 50.2,49.37 v51.56,48.01
LCD.R3  (via drill 0.38 pad 0.18, 0.41)
  Top 0.203: v40.51,47.24 41.91,45.85 53.98,45.85 56.9,48.77 61.47,48.77 62.23,49.53 62.23,51.05 v63.25,52.07
  Bottom 0.203: BB.DISPLAY.CAPE-(CAPE).B8.34 BB.DISPLAY.CAPE-(BEAGLEBONE).B8.34 v63.25,52.07 | X2.8 38.2,49.56 v40.51,47.24
LCD.R4  (via drill 0.38 pad 0.18, 0.41)
  Top 0.203: v40.51,48.26 42.55,46.23 53.72,46.23 57.02,49.53 v61.21,49.53
  Bottom 0.203: BB.DISPLAY.CAPE-(BEAGLEBONE).B8.35 v61.21,49.53 62.23,48.51 78.74,48.51 79.76,49.53 BB.DISPLAY.CAPE-(CAPE).B8.35 | X2.9 38.7,50.07 v40.51,48.26
LCD.R5  (via drill 0.38 pad 0.18, 0.41)
  Top 0.203: v40.51,49.28 43.18,46.61 53.47,46.61 58.93,52.07 v61.21,52.07
  Bottom 0.203: BB.DISPLAY.CAPE-(CAPE).B8.33 79.76,52.07 78.49,50.8 62.48,50.8 v61.21,52.07 BB.DISPLAY.CAPE-(BEAGLEBONE).B8.33 | X2.10 39.2,50.59 v40.51,49.28
LCD.R6  (via drill 0.38 pad 0.18, 0.41)
  Top 0.203: v40.51,50.29 43.81,46.99 53.21,46.99 60.83,54.61 v61.21,54.61
  Bottom 0.203: BB.DISPLAY.CAPE-(BEAGLEBONE).B8.31 v61.21,54.61 62.48,53.34 78.49,53.34 79.76,54.61 BB.DISPLAY.CAPE-(CAPE).B8.31 | X2.11 39.7,51.1 v40.51,50.29
LCD.R7  (via drill 0.38 pad 0.18, 0.41)
  Top 0.203: v40.51,51.31 44.45,47.37 52.96,47.37 60.83,55.24 62.61,55.24 v63.25,54.61
  Bottom 0.203: BB.DISPLAY.CAPE-(CAPE).B8.32 BB.DISPLAY.CAPE-(BEAGLEBONE).B8.32 v63.25,54.61 | X2.12 40.2,51.62 v40.51,51.31
LCD.VSYNC  (via drill 0.38 pad 0.18, 0.41)
  Top 0.203: v51.56,49.02 52.7,49.02 60.58,56.9 60.58,59.05 v61.21,59.69
  Bottom 0.203: BB.DISPLAY.CAPE-(BEAGLEBONE).B8.27 v61.21,59.69 62.48,58.42 78.49,58.42 79.76,59.69 BB.DISPLAY.CAPE-(CAPE).B8.27 | X2.33 50.7,49.88 v51.56,49.02
LED+
  Bottom 0.254: X2.2 35.2,54.84
  Bottom 0.381: D2.C 43.89,78.92 46.1,76.71 46.1,65.02 44.58,63.5 35.18,63.5 33.27,61.59 33.27,56.77 35.2,54.84
  pour Bottom: 41.91,77.72 39.88,77.72 39.5,78.11 29.84,78.11 29.34,78.61 29.34,80.39 28.83,80.9 28.83,83.57 29.34,84.07 34.92,84.07 37.21,81.79 40.26,81.79 43.05,78.99 43.05,78.87
LED-
  pour Bottom: 32.26,77.22 34.29,77.22 34.67,76.83 34.67,73.79 34.42,73.53 33.91,73.53 33.66,73.28 33.66,70.87 33.4,70.61 32.77,70.61 32.26,71.12 30.1,71.12 29.34,70.36 29.34,64.77 32.51,61.59 32.51,55.63 34.29,53.85 34.8,53.85 34.8,52.58 34.16,52.58 32.38,54.36 32.38,61.47 28.19,65.66 28.19,74.8 28.45,75.06 31.11,75.06 31.5,75.44 31.5,76.45
P8.3
  Bottom 0.203: BB.DISPLAY.CAPE-(CAPE).B8.3 79.76,90.17 78.87,89.28 62.1,89.28 61.21,90.17 BB.DISPLAY.CAPE-(BEAGLEBONE).B8.3
P8.4
  Bottom 0.203: BB.DISPLAY.CAPE-(BEAGLEBONE).B8.4 66.42,90.17 66.93,89.66 74.04,89.66 74.55,90.17 BB.DISPLAY.CAPE-(CAPE).B8.4
P8.5
  Bottom 0.203: BB.DISPLAY.CAPE-(BEAGLEBONE).B8.5 61.21,87.63 62.48,86.36 78.49,86.36 79.76,87.63 BB.DISPLAY.CAPE-(CAPE).B8.5
P8.6
  Bottom 0.203: BB.DISPLAY.CAPE-(BEAGLEBONE).B8.6 BB.DISPLAY.CAPE-(CAPE).B8.6
P8.7
  Bottom 0.203: BB.DISPLAY.CAPE-(BEAGLEBONE).B8.7 61.21,85.09 62.1,84.2 78.87,84.2 79.76,85.09 BB.DISPLAY.CAPE-(CAPE).B8.7
P8.8
  Bottom 0.203: BB.DISPLAY.CAPE-(BEAGLEBONE).B8.8 BB.DISPLAY.CAPE-(CAPE).B8.8
P8.10
  Bottom 0.203: BB.DISPLAY.CAPE-(BEAGLEBONE).B8.10 BB.DISPLAY.CAPE-(CAPE).B8.10
P8.11
  Bottom 0.203: BB.DISPLAY.CAPE-(BEAGLEBONE).B8.11 61.21,80.01 62.48,78.74 78.49,78.74 79.76,80.01 BB.DISPLAY.CAPE-(CAPE).B8.11
P8.12
  Bottom 0.203: BB.DISPLAY.CAPE-(BEAGLEBONE).B8.12 BB.DISPLAY.CAPE-(CAPE).B8.12
P8.13
  Bottom 0.203: BB.DISPLAY.CAPE-(BEAGLEBONE).B8.13 61.21,77.47 62.48,76.2 78.49,76.2 79.76,77.47 BB.DISPLAY.CAPE-(CAPE).B8.13
P8.14
  Bottom 0.203: BB.DISPLAY.CAPE-(BEAGLEBONE).B8.14 BB.DISPLAY.CAPE-(CAPE).B8.14
P8.15
  Bottom 0.203: BB.DISPLAY.CAPE-(BEAGLEBONE).B8.15 61.21,74.93 62.48,73.66 78.49,73.66 79.76,74.93 BB.DISPLAY.CAPE-(CAPE).B8.15
P8.16
  Bottom 0.203: BB.DISPLAY.CAPE-(BEAGLEBONE).B8.16 BB.DISPLAY.CAPE-(CAPE).B8.16
P8.17
  Bottom 0.203: BB.DISPLAY.CAPE-(BEAGLEBONE).B8.17 61.21,72.39 62.48,71.12 78.49,71.12 79.76,72.39 BB.DISPLAY.CAPE-(CAPE).B8.17
P8.18
  Bottom 0.203: BB.DISPLAY.CAPE-(BEAGLEBONE).B8.18 BB.DISPLAY.CAPE-(CAPE).B8.18
P8.19
  Bottom 0.203: BB.DISPLAY.CAPE-(BEAGLEBONE).B8.19 61.21,69.85 62.48,68.58 78.49,68.58 79.76,69.85 BB.DISPLAY.CAPE-(CAPE).B8.19
P8.20
  Bottom 0.203: BB.DISPLAY.CAPE-(BEAGLEBONE).B8.20 BB.DISPLAY.CAPE-(CAPE).B8.20
P8.21
  Bottom 0.203: BB.DISPLAY.CAPE-(BEAGLEBONE).B8.21 61.21,67.31 62.48,66.04 78.49,66.04 79.76,67.31 BB.DISPLAY.CAPE-(CAPE).B8.21
P8.22
  Bottom 0.203: BB.DISPLAY.CAPE-(BEAGLEBONE).B8.22 BB.DISPLAY.CAPE-(CAPE).B8.22
P8.23
  Bottom 0.203: BB.DISPLAY.CAPE-(BEAGLEBONE).B8.23 61.21,64.77 62.48,63.5 78.49,63.5 79.76,64.77 BB.DISPLAY.CAPE-(CAPE).B8.23
P8.24
  Bottom 0.203: BB.DISPLAY.CAPE-(BEAGLEBONE).B8.24 BB.DISPLAY.CAPE-(CAPE).B8.24
P8.25
  Bottom 0.203: BB.DISPLAY.CAPE-(BEAGLEBONE).B8.25 61.21,62.23 62.48,60.96 78.49,60.96 79.76,62.23 BB.DISPLAY.CAPE-(CAPE).B8.25
P8.26
  Bottom 0.203: BB.DISPLAY.CAPE-(BEAGLEBONE).B8.26 BB.DISPLAY.CAPE-(CAPE).B8.26
P9.9  (via drill 0.38 pad 0.18)
  Top 0.203: v127.89,83.06 115.7,83.06 115.19,83.57 79.12,83.57 77.47,81.92 63.5,81.92 61.85,83.57 14.22,83.57 v13.97,83.31
  Bottom 0.203: BB.DISPLAY.CAPE-(BEAGLEBONE).B9.9 13.21,82.55 v13.97,83.31 | v127.89,83.06 128.4,82.55 BB.DISPLAY.CAPE-(CAPE).B9.9
P9.10  (via drill 0.38 pad 0.18)
  Top 0.203: v13.97,82.3 14.86,83.19 61.59,83.19 62.61,82.17 63.25,81.53 64.14,81.53 77.22,81.53 77.72,81.53 78.36,82.17 79.38,83.19 114.94,83.19 116.2,81.92 v126.11,81.92
  Bottom 0.203: BB.DISPLAY.CAPE-(BEAGLEBONE).B9.10 14.22,82.55 v13.97,82.3 | v126.11,81.92 125.48,82.55 BB.DISPLAY.CAPE-(CAPE).B9.10
P9.11  (via drill 0.38 pad 0.18)
  Top 0.203: v127.89,80.52 116.97,80.52 114.68,82.8 79.63,82.8 77.98,81.15 62.99,81.15 61.34,82.8 15.49,82.8 v13.97,81.28
  Bottom 0.203: v127.89,80.52 128.4,80.01 BB.DISPLAY.CAPE-(CAPE).B9.11 | BB.DISPLAY.CAPE-(BEAGLEBONE).B9.11 12.7,80.01 v13.97,81.28
P9.13  (via drill 0.38 pad 0.18)
  Top 0.203: v127.89,77.98 118.24,77.98 114.17,82.04 80.14,82.04 78.49,80.39 62.48,80.39 60.83,82.04 16.76,82.04 13.08,78.36 v13.08,77.47
  Bottom 0.203: BB.DISPLAY.CAPE-(BEAGLEBONE).B9.13 v13.08,77.47 | v127.89,77.98 128.4,77.47 BB.DISPLAY.CAPE-(CAPE).B9.13
P9.14  (via drill 0.38 pad 0.18)
  Top 0.203: v126.11,76.96 118.62,76.96 113.92,81.66 80.39,81.66 78.74,80.01 62.23,80.01 60.58,81.66 17.4,81.66 14.86,79.12 v14.86,77.47
  Bottom 0.203: v126.11,76.96 125.6,77.47 BB.DISPLAY.CAPE-(CAPE).B9.14 | v14.86,77.47 BB.DISPLAY.CAPE-(BEAGLEBONE).B9.14
P9.15  (via drill 0.38 pad 0.18)
  Top 0.203: v127.89,75.44 119.51,75.44 113.67,81.28 80.64,81.28 78.99,79.63 61.98,79.63 60.33,81.28 18.03,81.28 15.62,78.87 15.62,77.22 13.72,75.31 v13.08,75.31
  Bottom 0.203: BB.DISPLAY.CAPE-(BEAGLEBONE).B9.15 12.7,74.93 v13.08,75.31 | v127.89,75.44 128.4,74.93 BB.DISPLAY.CAPE-(CAPE).B9.15
P9.16  (via drill 0.38 pad 0.18)
  Top 0.203: v126.11,74.42 119.89,74.42 113.41,80.9 80.9,80.9 79.25,79.25 61.72,79.25 60.07,80.9 18.67,80.9 16.13,78.36 16.13,76.58 v14.86,75.31
  Bottom 0.203: BB.DISPLAY.CAPE-(BEAGLEBONE).B9.16 15.24,74.93 v14.86,75.31 | v126.11,74.42 125.6,74.93 BB.DISPLAY.CAPE-(CAPE).B9.16
P9.17  (via drill 0.38 pad 0.18)
  Top 0.203: v13.08,71.88 13.72,72.52 19.05,72.52 29.21,62.36 56.52,62.36 67.06,72.9 v127.89,72.9
  Bottom 0.203: v127.89,72.9 128.4,72.39 BB.DISPLAY.CAPE-(CAPE).B9.17 | BB.DISPLAY.CAPE-(BEAGLEBONE).B9.17 12.57,72.39 v13.08,71.88
P9.18  (via drill 0.38 pad 0.18)
  Top 0.203: v14.86,71.88 19.05,71.88 28.96,61.98 56.77,61.98 66.55,71.75 v126.11,71.75
  Bottom 0.203: BB.DISPLAY.CAPE-(BEAGLEBONE).B9.18 15.37,72.39 v14.86,71.88 | v126.11,71.75 125.48,72.39 BB.DISPLAY.CAPE-(CAPE).B9.18
P9.21  (via drill 0.38 pad 0.18)
  Top 0.203: v13.08,67.82 19.56,67.82 33.53,53.85 50.55,53.85 64.52,67.82 v127.89,67.82
  Bottom 0.203: BB.DISPLAY.CAPE-(BEAGLEBONE).B9.21 12.57,67.31 v13.08,67.82 | v127.89,67.82 128.4,67.31 BB.DISPLAY.CAPE-(CAPE).B9.21
P9.22  (via drill 0.38 pad 0.18)
  Top 0.203: v14.86,66.8 19.94,66.8 33.27,53.47 50.8,53.47 64.14,66.8 v126.11,66.8
  Bottom 0.203: BB.DISPLAY.CAPE-(BEAGLEBONE).B9.22 15.37,67.31 v14.86,66.8 | v126.11,66.8 125.6,67.31 BB.DISPLAY.CAPE-(CAPE).B9.22
P9.23  (via drill 0.38 pad 0.18)
  Top 0.203: v13.08,65.28 20.83,65.28 33.02,53.09 51.05,53.09 63.25,65.28 v127.89,65.28
  Bottom 0.203: BB.DISPLAY.CAPE-(BEAGLEBONE).B9.23 12.57,64.77 v13.08,65.28 | v127.89,65.28 128.4,64.77 BB.DISPLAY.CAPE-(CAPE).B9.23
P9.24  (via drill 0.38 pad 0.18)
  Top 0.203: v14.86,64.26 21.21,64.26 32.77,52.7 51.31,52.7 62.87,64.26 v126.11,64.26
  Bottom 0.203: BB.DISPLAY.CAPE-(BEAGLEBONE).B9.24 15.37,64.77 v14.86,64.26 | BB.DISPLAY.CAPE-(CAPE).B9.24 125.6,64.77 v126.11,64.26
P9.25  (via drill 0.38 pad 0.18)
  Top 0.203: v13.08,62.74 22.1,62.74 32.51,52.32 51.56,52.32 61.98,62.74 v127.89,62.74
  Bottom 0.203: BB.DISPLAY.CAPE-(BEAGLEBONE).B9.25 12.57,62.23 v13.08,62.74 | v127.89,62.74 128.4,62.23 BB.DISPLAY.CAPE-(CAPE).B9.25
P9.26  (via drill 0.38 pad 0.18)
  Top 0.203: v14.86,61.72 22.48,61.72 32.26,51.94 51.82,51.94 61.59,61.72 v126.11,61.72
  Bottom 0.203: BB.DISPLAY.CAPE-(BEAGLEBONE).B9.26 15.37,62.23 v14.86,61.72 | v126.11,61.72 125.6,62.23 BB.DISPLAY.CAPE-(CAPE).B9.26
P9.27  (via drill 0.38 pad 0.18)
  Top 0.203: v13.08,60.2 23.37,60.2 54.99,28.57 88.27,28.57 119.89,60.2 v127.89,60.2
  Bottom 0.203: BB.DISPLAY.CAPE-(BEAGLEBONE).B9.27 12.57,59.69 v13.08,60.2 | v127.89,60.2 128.4,59.69 BB.DISPLAY.CAPE-(CAPE).B9.27
P9.28  (via drill 0.38 pad 0.18)
  Top 0.203: v14.86,59.18 23.75,59.18 54.74,28.19 88.52,28.19 119.51,59.18 v126.11,59.18
  Bottom 0.203: BB.DISPLAY.CAPE-(BEAGLEBONE).B9.28 15.37,59.69 v14.86,59.18 | v126.11,59.18 125.6,59.69 BB.DISPLAY.CAPE-(CAPE).B9.28
P9.29  (via drill 0.38 pad 0.18)
  Top 0.203: v13.08,57.53 24.77,57.53 54.48,27.81 88.77,27.81 118.49,57.53 v127.89,57.53
  Bottom 0.203: BB.DISPLAY.CAPE-(BEAGLEBONE).B9.29 12.7,57.15 v13.08,57.53 | v127.89,57.53 128.27,57.15 BB.DISPLAY.CAPE-(CAPE).B9.29
P9.30  (via drill 0.38 pad 0.18)
  Top 0.203: v14.86,56.9 24.77,56.9 54.23,27.43 89.03,27.43 118.11,56.52 v126.11,56.52
  Bottom 0.203: v14.86,56.9 15.11,57.15 BB.DISPLAY.CAPE-(BEAGLEBONE).B9.30 | v126.11,56.52 125.48,57.15 BB.DISPLAY.CAPE-(CAPE).B9.30
P9.31  (via drill 0.38 pad 0.18)
  Top 0.203: v13.08,54.74 26.29,54.74 53.98,27.05 89.28,27.05 117.35,55.12 v127.89,55.12
  Bottom 0.203: BB.DISPLAY.CAPE-(BEAGLEBONE).B9.31 12.95,54.61 v13.08,54.74 | v127.89,55.12 128.4,54.61 BB.DISPLAY.CAPE-(CAPE).B9.31
P9.32  (via drill 0.38 pad 0.18)
  Top 0.203: v14.86,54.1 26.29,54.1 53.72,26.67 89.53,26.67 116.97,54.1 v126.11,54.1
  Bottom 0.203: BB.DISPLAY.CAPE-(BEAGLEBONE).B9.32 15.37,54.61 v14.86,54.1 | v126.11,54.1 125.6,54.61 BB.DISPLAY.CAPE-(CAPE).B9.32
P9.33  (via drill 0.38 pad 0.18)
  Top 0.203: v13.08,52.58 27.18,52.58 53.47,26.29 89.79,26.29 116.08,52.58 v127.89,52.58
  Bottom 0.203: BB.DISPLAY.CAPE-(BEAGLEBONE).B9.33 12.57,52.07 v13.08,52.58 | v127.89,52.58 128.4,52.07 BB.DISPLAY.CAPE-(CAPE).B9.33
P9.34  (via drill 0.38 pad 0.18)
  Top 0.203: v14.86,51.56 27.56,51.56 53.21,25.91 90.04,25.91 115.7,51.56 v126.11,51.56
  Bottom 0.203: BB.DISPLAY.CAPE-(BEAGLEBONE).B9.34 15.37,52.07 v14.86,51.56 | v126.11,51.56 125.6,52.07 BB.DISPLAY.CAPE-(CAPE).B9.34
P9.35  (via drill 0.38 pad 0.18)
  Top 0.203: v13.08,50.04 28.45,50.04 52.96,25.53 90.3,25.53 114.81,50.04 v127.89,50.04
  Bottom 0.203: BB.DISPLAY.CAPE-(BEAGLEBONE).B9.35 12.57,49.53 v13.08,50.04 | v127.89,50.04 128.4,49.53 BB.DISPLAY.CAPE-(CAPE).B9.35
P9.36  (via drill 0.38 pad 0.18)
  Top 0.203: v14.86,49.02 28.83,49.02 52.7,25.15 90.55,25.15 114.43,49.02 v126.11,49.02
  Bottom 0.203: BB.DISPLAY.CAPE-(BEAGLEBONE).B9.36 15.37,49.53 v14.86,49.02 | v126.11,49.02 125.6,49.53 BB.DISPLAY.CAPE-(CAPE).B9.36
P9.37  (via drill 0.38 pad 0.18)
  Top 0.203: v13.08,47.5 29.72,47.5 52.45,24.77 90.81,24.77 113.54,47.5 v127.89,47.5
  Bottom 0.203: BB.DISPLAY.CAPE-(BEAGLEBONE).B9.37 12.57,46.99 v13.08,47.5 | v127.89,47.5 128.4,46.99 BB.DISPLAY.CAPE-(CAPE).B9.37
P9.38  (via drill 0.38 pad 0.18)
  Top 0.203: v14.86,46.48 30.1,46.48 52.2,24.38 91.06,24.38 113.16,46.48 v126.11,46.48
  Bottom 0.203: BB.DISPLAY.CAPE-(BEAGLEBONE).B9.38 15.37,46.99 v14.86,46.48 | v126.11,46.48 125.6,46.99 BB.DISPLAY.CAPE-(CAPE).B9.38
P9.39  (via drill 0.38 pad 0.18)
  Top 0.203: v13.08,44.96 30.99,44.96 51.94,24 91.31,24 112.27,44.96 v127.89,44.96
  Bottom 0.203: BB.DISPLAY.CAPE-(BEAGLEBONE).B9.39 12.57,44.45 v13.08,44.96 | v127.89,44.96 128.4,44.45 BB.DISPLAY.CAPE-(CAPE).B9.39
P9.40  (via drill 0.38 pad 0.18)
  Top 0.203: v14.86,43.94 31.37,43.94 51.69,23.62 91.57,23.62 111.89,43.94 v126.11,43.94
  Bottom 0.203: BB.DISPLAY.CAPE-(BEAGLEBONE).B9.40 15.37,44.45 v14.86,43.94 | v126.11,43.94 125.6,44.45 BB.DISPLAY.CAPE-(CAPE).B9.40
P9.41  (via drill 0.38 pad 0.18)
  Top 0.203: v13.08,42.42 32.26,42.42 51.44,23.24 91.82,23.24 111,42.42 v127.89,42.42
  Bottom 0.203: BB.DISPLAY.CAPE-(BEAGLEBONE).B9.41 12.57,41.91 v13.08,42.42 | v127.89,42.42 128.4,41.91 BB.DISPLAY.CAPE-(CAPE).B9.41
P9.42  (via drill 0.38 pad 0.18)
  Top 0.203: v14.86,41.4 32.64,41.4 51.18,22.86 92.08,22.86 110.62,41.4 v126.11,41.4
  Bottom 0.203: BB.DISPLAY.CAPE-(BEAGLEBONE).B9.42 15.37,41.91 v14.86,41.4 | v126.11,41.4 125.6,41.91 BB.DISPLAY.CAPE-(CAPE).B9.42
PUMP
  pour Bottom: 43.43,70.99 36.58,70.99 36.45,71.12 36.45,73.66 37.34,74.55 39.37,74.55 39.88,75.06 39.88,76.2 41.91,76.2 41.91,75.44 42.42,74.93 43.56,74.93 43.94,74.55 43.94,71.5
VCC  (via drill 0.38 pad 0.18, 0.41, 0.76 pad 0.18)
  Top 0.508: v48.64,55.75 48.01,55.12 36.32,55.12 v34.67,56.77 32.77,56.77 18.54,70.99 12.7,70.99 12.19,70.48 12.19,57.15 13.53,55.82 v20.7,55.82 v22.61,55.82 v24.51,55.82
  Top 1.524: v14.73,90.17 65.41,90.17 67.31,88.27 73.66,88.27 75.56,90.17 v126.24,90.17 | v13.21,90.17 9.02,90.17 4.32,85.47 v4.32,78.99 v4.32,77.09 4.32,74.3
  Bottom 0.203: 4.3.3 5.0.3 24.9,52.74 24.39,53.24 C7.1 24.39,55.7 v24.51,55.82 | R7.2 22.61,56.21 v22.61,55.82 | R8.2 20.7,56.21 v20.7,55.82 | C9.1 v5.71,72.39 | IC3.8 5.8,72.3 v5.71,72.39 | R6.2 5.72,72.38 v5.71,72.39 | R3.1 4.45,77.09 | R4.1 4.45,77.09 | 4.45,77.09 v4.32,77.09 | R5.1 v4.32,78.99
  Bottom 0.254: X2.31 49.7,55.59 C4.1 48.76,55.63 v48.64,55.75 | C3.1 34.42,57.02 v34.67,56.77 34.99,56.45 C8.1 36.2,56.33 X2.4
  other vias: 127.76,90.17
  pour Bottom: 9.65,89.53 9.65,90.81 10.03,91.19 17.91,91.19 18.29,90.81 18.29,89.53 17.91,89.15 10.03,89.15
  pour Bottom: 122.68,89.53 122.68,90.81 123.06,91.19 130.94,91.19 131.32,90.81 131.32,89.53 130.94,89.15 123.06,89.15
  pour Top: 9.65,89.53 9.65,90.81 10.03,91.19 17.91,91.19 18.29,90.81 18.29,89.53 17.91,89.15 10.03,89.15
  pour Top: 122.68,89.53 122.68,90.81 123.06,91.19 130.94,91.19 131.32,90.81 131.32,89.53 130.94,89.15 123.06,89.15
  pour Top: 12.95,70.99 12.32,70.36 12.06,70.36 11.56,70.87 10.79,70.87 6.48,70.87 3.68,73.66 3.68,76.07 7.75,72.01 10.03,72.01 11.94,72.01
VDD.5V  (via drill 0.76 pad 0.18)
  Top 1.524: v14.73,87.63 64.14,87.63 66.04,85.72 74.93,85.72 76.83,87.63 v126.24,87.63
  other vias: 127.76,87.63 13.21,87.63
  pour Bottom: 9.65,87 9.65,88.27 10.03,88.65 17.91,88.65 18.29,88.27 18.29,87 17.91,86.61 10.03,86.61
  pour Bottom: 122.68,87 122.68,88.27 123.06,88.65 130.94,88.65 131.32,88.27 131.32,87 130.94,86.61 123.06,86.61
  pour Top: 9.65,87 9.65,88.27 10.03,88.65 17.91,88.65 18.29,88.27 18.29,87 17.91,86.61 10.03,86.61
  pour Top: 122.68,87 122.68,88.27 123.06,88.65 130.94,88.65 131.32,88.27 131.32,87 130.94,86.61 123.06,86.61
WAKE  (via drill 0.38 pad 0.18)
  Top 0.203: v24.13,39.88 14.61,39.88 5.59,48.9 TP1.P$1
  Bottom 0.203: 5.0.4 4.3.4 25.4,41.14 v24.13,39.88
WP  (via drill 0.38 pad 0.18)
  Top 0.203: v6.6,70.1 3.17,73.53 3.17,85.98 8.89,91.69 15.49,91.69 JMP1.1
  Bottom 0.203: IC3.7 7.24,71.64 R6.1 6.72,70.22 v6.6,70.1

## Text on the board
tPlace: BeagleBone | Display50 | Cape | A2
bPlace: EEPROM / WP | A1 | A0
Milling: Cutout Slot | Cutout Slot | Cutout Slot